# Altium PCB Lite Carrier for Mu.PcbDoc (part 7 of 15)
Units mm, origin at the board's own origin, x right, y up, seen from the top; angles counter-clockwise.
Board outline 146 x 102 mm, 20 copper layers (F.Cu, F.Mask, B.Cu, B.Mask, In1.Cu, F.SilkS, In2.Cu, B.SilkS, F.Adhes, B.Adhes, F.Paste, B.Paste, Dwgs.User, Cmts.User, Eco1.User, Eco2.User, Edge.Cuts, Margin, B.CrtYd, F.CrtYd); 254 components, 382 nets, 1258 pads, 1020 vias.
Unrouted connection lines stored in the file: 113.
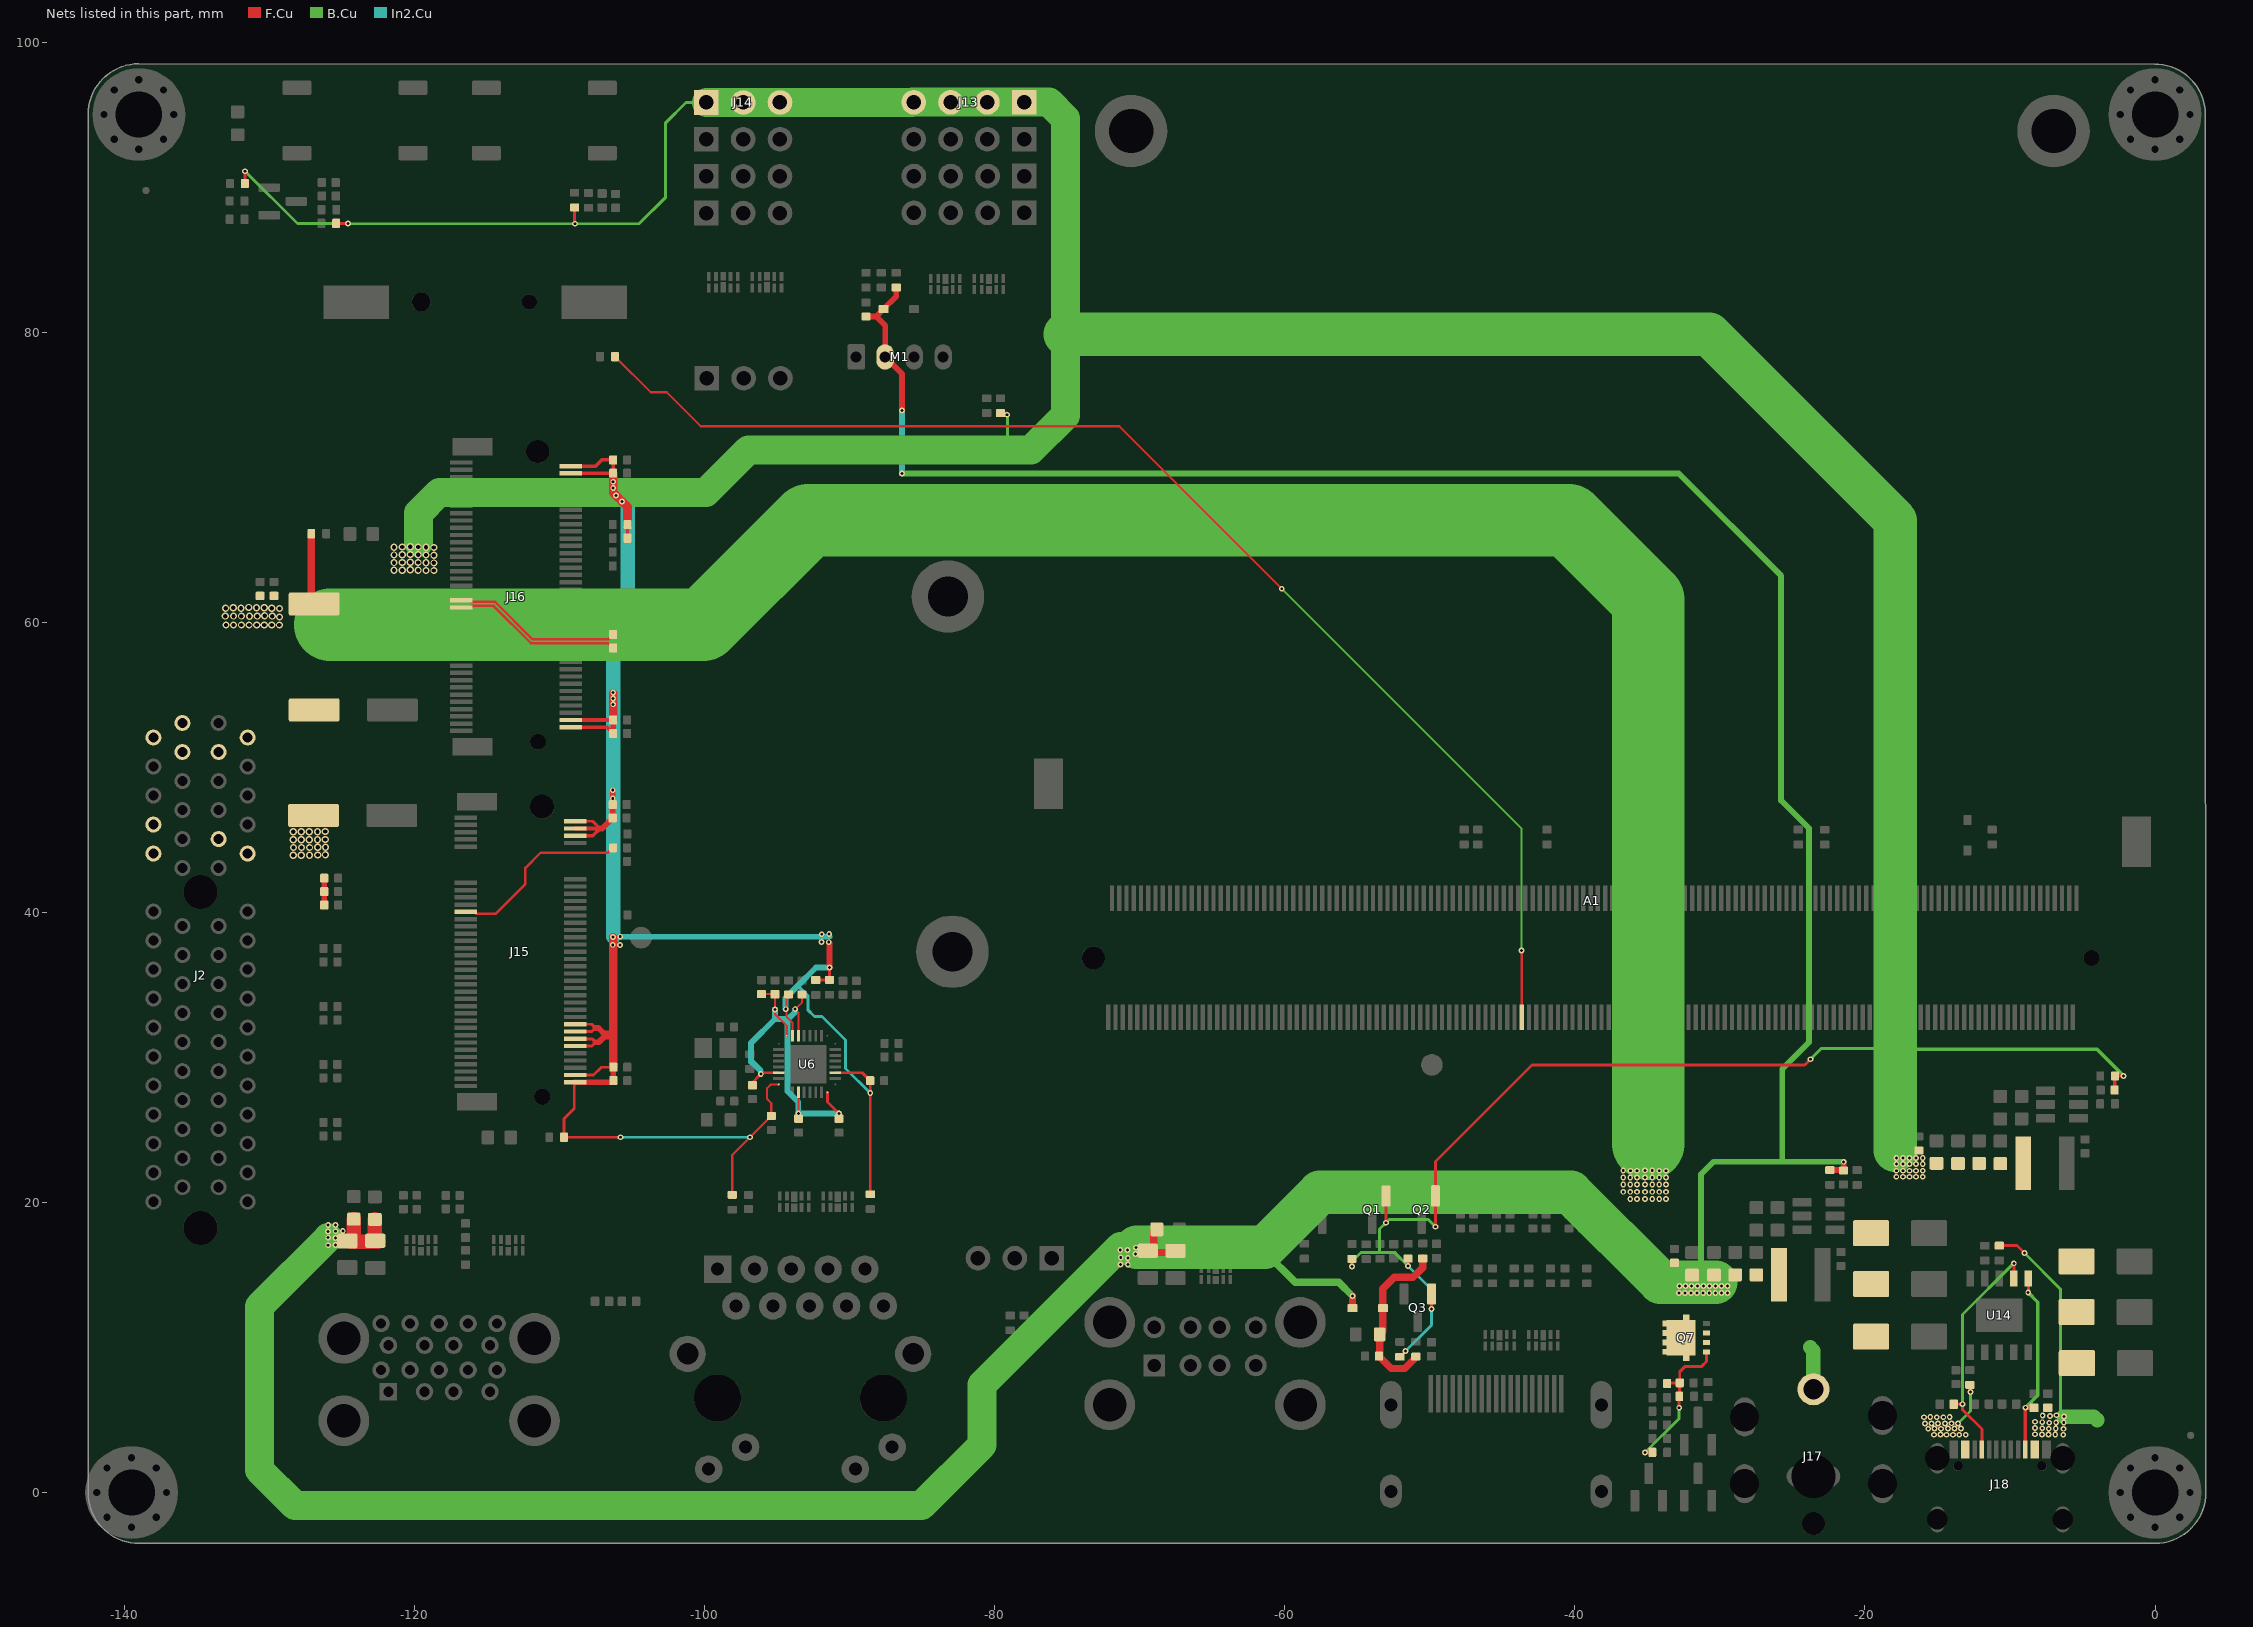
[diagram p18: the nets of this part, all layers, seen from the top]

## Components (designator, comment, footprint, x,y, rotation, side; value= is the part's Value field where it differs from the comment) (continued)
TP13 "Comment" TestPoint_Pad_D1.5mm#2 -13,48 r180 top value=TestPoint
U1 "Comment" Diodes_UDFN-10_1.0x2.5mm_P0.5mm#1 -42.18,10.497 r270 top value=TPAZ1023-04F
U2 "Comment" Diodes_UDFN-10_1.0x2.5mm_P0.5mm#1 -45.19,10.497 r270 top value=TPAZ1023-04F
U3 "Comment" Diodes_UDFN-10_1.0x2.5mm_P0.5mm#1 -119.55,17.057 r270 top value=ULC0524P
U4 "Comment" Diodes_UDFN-10_1.0x2.5mm_P0.5mm#2 -64.75,15.068 r270 top value=ULC0524P
U5 "Comment" Diodes_UDFN-10_1.0x2.5mm_P0.5mm#1 -113.53,17.057 r270 top value=ULC0524P
U6 "Comment" QFN-32-1EP_4x4mm_P0.4mm_EP2.65x2.65mm -92.935,29.54 r90 top value=RTL8111H-CG-RH
U7 "Comment" Diodes_UDFN-10_1.0x2.5mm_P0.5mm#3 -90.815,20.046 r270 top value=ULC0524P
U8 "Comment" Diodes_UDFN-10_1.0x2.5mm_P0.5mm#3 -93.815,20.041 r270 top value=ULC0524P
U9 "Comment" Diodes_UDFN-10_1.0x2.5mm_P0.5mm#1 -80.4,83.32 r270 top value=ULC0524P
U10 "Comment" Diodes_UDFN-10_1.0x2.5mm_P0.5mm#1 -98.71,83.443 r90 top value=ULC0524P
U11 "Comment" Diodes_UDFN-10_1.0x2.5mm_P0.5mm#1 -83.4,83.32 r270 top value=ULC0524P
U12 "Comment" Diodes_UDFN-10_1.0x2.5mm_P0.5mm#1 -95.7,83.44 r90 top value=ULC0524P
U13 "Comment" SOT-23 -34.91,0.372 r90 top value=TL431DBZ
U14 "Comment" ESSOP-10-1EP_3.9x5mm_P1.0mm_EP3.2x2.3 -10.74,12.22 r90 top value=CH224K
U15 "Comment" TSOT-23-6 -23.2,19.065 r180 top value=SY8253ADC
U16 "Comment" TSOT-23-6 -6.42,26.748 r180 top value=SY8253ADC
Y1 "Comment" Crystal_SMD_3225-4Pin_3.2x2.5mm -99.235,29.54 r270 top value=25MHz

## Footprints (in the part's own frame and the unit in brackets; to place one, negate y for a bottom-side part, rotate by r counter-clockwise, add the part's x,y. Pads: shape width x height; smd on the part's side, far side on the other; paste and mask are expansions set on the pad)
Battery_Holder_CR1220_S8411-45R [mm]
  rect 2.3x4.5 smd paste-4.5 mask-4.5: 1(0,-8.2) 2(0,8.2)
  round 1.05 hole 1.05 paste-2539.97 mask-1.05: Un1(0,3.725)
  round 1.3 hole 1.3 paste-2539.97 mask-1.3: Un2(0,-3.725)
  F.SilkS lines w0.254: 1.49,-8.307 6.832,-8.307 6.832,-6.625 3.296,-6.625 3.297,-6.625 ccw(c0,0) 3.295,6.626 ; -1.553,-8.307 -6.832,-8.307 -6.832,-6.625 -3.27,-6.625 -3.295,-6.626 cw(c0,0) -3.297,6.625
C_0402_1005Metric [mm]
  rrect25% 0.56x0.62 smd paste-0.62 mask-0.62: 1(-0.48,0) 2(0.48,0)
  F.SilkS lines w0.254: 0.108,0.36 -0.108,0.36 ; 0.108,-0.36 -0.108,-0.36
  F.CrtYd lines w0.254: 0.91,0.46 0.91,-0.46 -0.91,-0.46 -0.91,0.46 0.91,0.46
C_0603_1608Metric [mm]
  rrect25% 0.9x0.95 smd paste-0.95 mask-0.95: 1(-0.775,0) 2(0.775,0)
  F.SilkS lines w0.254: 0.141,0.51 -0.141,0.51 ; 0.141,-0.51 -0.141,-0.51
  F.CrtYd lines w0.254: 1.48,0.73 1.48,-0.73 -1.48,-0.73 -1.48,0.73 1.48,0.73
CP_Elec_6.3x7.7 [mm]
  rrect16% 3.5x1.6 smd paste-3.5 mask-3.5: 1(-2.7,0) 2(2.7,0)
  F.SilkS lines w0.254: -4.437,1.847 -3.65,1.847 ; -4.044,1.454 -4.044,2.241 ; -3.41,-1.06 -3.41,-2.346 -2.346,-3.41 3.41,-3.41 3.41,-1.06 ; -3.41,1.06 -3.41,2.346 -2.346,3.41 3.41,3.41 3.41,1.06
  F.CrtYd lines w0.254: -4.7,-1.05 -4.7,1.05 -3.55,1.05 -3.55,2.4 -2.4,3.55 3.55,3.55 3.55,1.05 4.7,1.05 4.7,-1.05 3.55,-1.05 3.55,-3.55 -2.4,-3.55 -3.55,-2.4 -3.55,-1.05 -4.7,-1.05
Crystal_SMD_3225-4Pin_3.2x2.5mm [mm]
  rect 1.4x1.2 smd paste-1.4 mask-1.4: 1(-1.1,-0.85) 2(1.1,-0.85) 3(1.1,0.85) 4(-1.1,0.85)
  F.SilkS lines w0.254: 0,-1.65 0,-0.01 -2,0 ; 2,-1.65 -2,-1.65 -2,1.65 2,1.65 2,-1.65
  F.CrtYd lines w0.254: 2.1,-1.7 -2.1,-1.7 -2.1,1.7 2.1,1.7 2.1,-1.7
D_0402_1005Metric [mm]
  rrect25% 0.59x0.64 smd paste-0.64 mask-0.64: 1(-0.485,0) 2(0.485,0)
  F.SilkS region: 0.1,-0.25 -0.09,0 0.1,0.25
  F.SilkS lines w0.254: -0.09,0.25 -0.09,-0.25
  F.CrtYd lines w0.254: -0.93,0.47 0.93,0.47 0.93,-0.47 -0.93,-0.47 -0.93,0.47
D_SMA [mm]
  rrect14% 2.5x1.8 smd paste-2.5 mask-2.5: 1(-2,0) 2(2,0)
  F.SilkS lines w0.254: 2,1.65 -3.51,1.65 -3.51,-1.65 2,-1.65 ; 0.501,-0.001 0.3,0 ; -0.401,0.4 -0.401,-0.4 ; -0.649,-0.001 -0.401,0 ; -0.401,0 0.3,-0.6 0.3,0.6 -0.401,0
  F.CrtYd lines w0.254: 3.5,1.75 3.5,-1.75 -3.5,-1.75 -3.5,1.75 3.5,1.75
D_SOD-323 [mm]
  rrect25% 0.7x0.55 smd paste-0.7 mask-0.7: 1(-1.05,0) 2(1.05,0)
  F.SilkS lines w0.254: 1.05,0.85 -1.61,0.85 -1.61,-0.85 1.05,-0.85 ; 0.425,0 0.175,0 ; -0.325,0.35 -0.325,-0.35 ; -0.525,0 -0.325,0 ; -0.325,0 0.175,-0.35 0.175,0.35 -0.325,0
  F.CrtYd lines w0.254: 1.6,0.95 -1.6,0.95 -1.6,-0.95 1.6,-0.95 1.6,0.95
DC_Jack_DC007B_30V_10A [mm]
  round 2.2 hole 1.4 paste-2539.97 mask-2.2: 1(0,-12)
  rrect100% 3.7x1.5 hole 3 slot 0.8 at 90 deg paste-2539.97 mask-3.7: 2(0,-6)
  rrect100% 1.5x2.7 hole 2 slot 0.8 at 0 deg paste-2539.97 mask-2.7: 3(-4.75,-5.5) 3(-4.75,-10.2) 3(4.75,-5.5) 3(4.75,-10.1)
  round 1.6 hole 1.6 paste-2539.97 mask-1.6: Un1(0,-2.75)
  F.SilkS lines w0.254: 5,0 5,-13 -5,-13 -5,0 5,0
Diodes_UDFN-10_1.0x2.5mm_P0.5mm#1 [mm]
  rect 0.625x0.25 smd paste-0.625 mask-0.625: 1(-0.387,1) 2(-0.387,0.5) 4(-0.387,-0.5) 5(-0.387,-1) 6(0.387,-1) 7(0.387,-0.5) 9(0.387,0.5) 10(0.387,1)
  rect 0.7x0.4 smd paste-0.7 mask-0.7: 3(-0.35,0)
  rect 0.575x0.4 smd paste-0.575 mask-0.575: 8(0.413,0)
  F.SilkS lines w0.254: 0.5,-1.35 -0.5,-1.35 ; 0.5,1.35 0,1.35
  F.CrtYd lines w0.254: 0.95,-1.5 -0.95,-1.5 -0.95,1.5 0.95,1.5 0.95,-1.5
Diodes_UDFN-10_1.0x2.5mm_P0.5mm#2 [mm]
  rect 0.625x0.25 smd paste-0.625 mask-0.625: 1(-0.387,1) 2(-0.387,0.5) 4(-0.387,-0.5) 5(-0.387,-1) 6(0.387,-1) 7(0.387,-0.5) 9(0.387,0.5) 10(0.387,1)
  rect 0.7x0.45 smd paste-0.7 mask-0.7: 3(-0.35,0)
  rect 0.575x0.45 smd paste-0.575 mask-0.575: 8(0.413,0)
  F.SilkS lines w0.254: 0.5,-1.35 -0.5,-1.35 ; 0.5,1.35 0,1.35
  F.CrtYd lines w0.254: 0.95,-1.5 -0.95,-1.5 -0.95,1.5 0.95,1.5 0.95,-1.5
Diodes_UDFN-10_1.0x2.5mm_P0.5mm#3 [mm]
  rect 0.625x0.25 smd paste-0.625 mask-0.625: 1(-0.387,1) 2(-0.387,0.5) 4(-0.387,-0.5) 5(-0.387,-1) 6(0.387,-1) 7(0.387,-0.5) 9(0.387,0.5) 10(0.387,1)
  rect 0.7x0.45 smd paste-0.7 mask-0.7: 3(-0.35,0)
  rect 0.575x0.45 smd paste-0.575 mask-0.575: 8(0.413,0)
  F.SilkS region: -0.89,1.31 -1.17,1.31 -0.89,1.59
  F.SilkS lines w0.254: 0.5,-1.36 -0.5,-1.36 ; 0.5,1.36 -0.5,1.36
  F.CrtYd lines w0.254: 0.95,-1.5 -0.95,-1.5 -0.95,1.5 0.95,1.5 0.95,-1.5
ESSOP-10-1EP_3.9x5mm_P1.0mm_EP3.2x2.3 [mm]
  rect 2.3x3.2 smd paste-3.2 mask-3.2: 0(0,0)
  rect 1.1x0.51 smd paste-1.1 mask-1.1: 1(-2.55,2) 2(-2.55,1) 3(-2.55,0) 4(-2.55,-1) 5(-2.55,-2) 6(2.55,-2) 7(2.55,-1) 8(2.55,0) 9(2.55,1) 10(2.55,2)
  F.SilkS circle w0.254: c-2.18,2.71 r0.22
  F.SilkS lines w0.254: -1.94,2.5 -1.94,-2.5 1.96,-2.5 1.96,2.5 -1.94,2.5
  F.CrtYd lines w0.254: -3.35,2.7 -3.35,-2.7 3.35,-2.7 3.35,2.7 -3.35,2.7
Fiducial_0.5mm_Mask1mm [mm]
  round 0.5 smd paste-0.5 mask-0.5: Un1(0,0)
  F.CrtYd circle w0.254: c0,0 r0.75
Fuse_0805_2012Metric [mm]
  rrect25% 0.975x1.4 smd paste-1.4 mask-1.4: 1(-0.937,0) 2(0.937,0)
  F.SilkS lines w0.254: 0.259,-0.71 -0.259,-0.71 ; 0.259,0.71 -0.259,0.71
  F.CrtYd lines w0.254: 1.68,-0.95 -1.68,-0.95 -1.68,0.95 1.68,0.95 1.68,-0.95
HDMI_A_Molex_208658-1001_Horizontal [mm]
  rect 2.6x0.3 smd paste-2.6 mask-2.6: 1(-3.285,4.5) 2(-3.285,4) 3(-3.285,3.5) 4(-3.285,3) 5(-3.285,2.5) 6(-3.285,2) 7(-3.285,1.5) 8(-3.285,1) 9(-3.285,0.5) 10(-3.285,0) 11(-3.285,-0.5) 12(-3.285,-1) 13(-3.285,-1.5) 14(-3.285,-2) 15(-3.285,-2.5) 16(-3.285,-3) 17(-3.285,-3.5) 18(-3.285,-4) 19(-3.285,-4.5)
  rrect100% 3.3x1.5 hole 0.9 slot 2.7 at 0 deg paste-2539.97 mask-3.3: SH(-2.525,7.25) SH(-2.525,-7.25)
  rrect100% 2.3x1.5 hole 0.9 slot 1.7 at 0 deg paste-2539.97 mask-2.3: SH(3.435,7.25) SH(3.435,-7.25)
  F.SilkS lines w0.254: 6.915,-7.61 4.815,-7.61 ; 2.115,-7.61 -0.685,-7.61 ; -4.235,-6.7 -4.235,-4.9 ; -4.985,4.9 -4.235,4.9 -4.235,6.7 ; 6.915,7.61 4.815,7.61 ; 2.115,7.61 -0.685,7.61
  Dwgs.User lines w0.254: 7.025,-7.5 7.025,7.5
  F.CrtYd lines w0.254: 4.52,-8.5 2.37,-8.5 2.37,-8.1 -0.96,-8.1 -0.96,-8.5 -4.69,-8.5 -4.69,-5.15 -5.09,-5.15 -5.09,5.15 -4.69,5.15 -4.69,8.5 -0.96,8.5 -0.96,8.1 2.37,8.1 2.37,8.5 4.52,8.5 4.52,8.1 8.53,8.1 8.53,-8.1 4.52,-8.1 4.52,-8.5
JST_PH_B4B-PH-K_1x04_P2.00mm_Vertical [mm]
  rrect21% 1.2x1.75 hole 0.75 paste-2539.97 mask-1.75: 1(0,0)
  rrect100% 1.2x1.75 hole 0.75 paste-2539.97 mask-1.75: 2(2,0) 3(4,0) 4(6,0)
  F.SilkS lines w0.254: -2.36,0.86 -2.36,2.11 -1.11,2.11 ; -2.06,-0.8 -1.45,-0.8 ; -2.06,0.5 -1.45,0.5 ; -0.3,1.81 -0.3,2.01 ; 0.5,1.81 0.5,1.2 -1.45,1.2 -1.45,-2.3 7.45,-2.3 7.45,1.2 5.5,1.2 5.5,1.81 ; 1,-1.8 0.9,-2.3 0.9,-1.8 1.1,-1.8 1.1,-2.3 ; 2.9,-2.3 2.9,-1.8 3.1,-1.8 3.1,-2.3 ; 3,-2.3 3,-1.8 ; 5.1,-2.3 5.1,-1.8 ; 7.45,-0.8 8.06,-0.8 ; 7.45,0.5 8.06,0.5 ; -0.3,2.01 -0.6,2.01 -0.6,1.81 -0.3,2.01 ; 5.1,-1.8 4.9,-1.8 4.9,-2.3 5.1,-1.8 ; -2.06,-2.91 -2.06,1.81 8.06,1.81 8.06,-2.91 -2.06,-2.91
  F.CrtYd lines w0.254: -2.45,-3.3 -2.45,2.2 8.45,2.2 8.45,-3.3 -2.45,-3.3
L_Sunlord_SWPA4020S [mm]
  rect 1.1x3.7 smd paste-3.7 mask-3.7: 1(-1.5,0) 2(1.5,0)
  F.SilkS lines w0.254: 2.26,2.11 2.26,2.26 -2.26,2.26 -2.26,2.11 ; 2.26,-2.11 2.26,-2.26 -2.26,-2.26 -2.26,-2.11
  F.CrtYd lines w0.254: 2.3,2.25 2.3,-2.25 -2.3,-2.25 -2.3,2.25 2.3,2.25
LattePanda_Module_H8.0mm_Horizontal [mm]
  rect 0.3x1.75 smd paste-1.75 mask-1.75: 1(33.375,4.1) 2(33.125,-4.1) 3(32.875,4.1) 4(32.625,-4.1) 5(32.375,4.1) 6(32.125,-4.1) 7(31.875,4.1) 8(31.625,-4.1) 9(31.375,4.1) 10(31.125,-4.1) 11(30.875,4.1) 12(30.625,-4.1) 13(30.375,4.1) 14(30.125,-4.1) 15(29.875,4.1) 16(29.625,-4.1) 17(29.375,4.1) 18(29.125,-4.1) 19(28.875,4.1) 20(28.625,-4.1) 21(28.375,4.1) 22(28.125,-4.1) 23(27.875,4.1) 24(27.625,-4.1) 25(27.375,4.1) 26(27.125,-4.1) 27(26.875,4.1) 28(26.625,-4.1) 29(26.375,4.1) 30(26.125,-4.1) 31(25.875,4.1) 32(25.625,-4.1) 33(25.375,4.1) 34(25.125,-4.1) 35(24.875,4.1) 36(24.625,-4.1) 37(24.375,4.1) 38(24.125,-4.1) 39(23.875,4.1) 40(23.625,-4.1) 41(23.375,4.1) 42(23.125,-4.1) 43(22.875,4.1) 44(22.625,-4.1) 45(22.375,4.1) 46(22.125,-4.1) 47(21.875,4.1) 48(21.625,-4.1) 49(21.375,4.1) 50(21.125,-4.1) 51(20.875,4.1) 52(20.625,-4.1) 53(20.375,4.1) 54(20.125,-4.1) 55(19.875,4.1) 56(19.625,-4.1) 57(19.375,4.1) 58(19.125,-4.1) 59(18.875,4.1) 60(18.625,-4.1) 61(18.375,4.1) 62(18.125,-4.1) 63(17.875,4.1) 64(17.625,-4.1) 65(17.375,4.1) 66(17.125,-4.1) 67(16.875,4.1) 68(16.625,-4.1) 69(16.375,4.1) 70(16.125,-4.1) 71(15.875,4.1) 72(15.625,-4.1) 73(15.375,4.1) 74(15.125,-4.1) 75(14.875,4.1) 76(14.625,-4.1) 77(14.375,4.1) 78(14.125,-4.1) 79(13.875,4.1) 80(13.625,-4.1) 81(13.375,4.1) 82(13.125,-4.1) 83(12.875,4.1) 84(12.625,-4.1) 85(12.375,4.1) 86(12.125,-4.1) 87(11.875,4.1) 88(11.625,-4.1) 89(11.375,4.1) 90(11.125,-4.1) 91(10.875,4.1) 92(10.625,-4.1) 93(10.375,4.1) 94(10.125,-4.1) 95(9.875,4.1) 96(9.625,-4.1) 97(9.375,4.1) 98(9.125,-4.1) 99(8.875,4.1) 100(8.625,-4.1) 101(8.375,4.1) 102(8.125,-4.1) 103(7.875,4.1) 104(7.625,-4.1) 105(7.375,4.1) 106(7.125,-4.1) 107(6.875,4.1) 108(6.625,-4.1) 109(6.375,4.1) 110(6.125,-4.1) 111(5.875,4.1) 112(5.625,-4.1) 113(5.375,4.1) 114(5.125,-4.1) 115(4.875,4.1) 116(4.625,-4.1) 117(4.375,4.1) 118(4.125,-4.1) 119(3.875,4.1) 120(3.625,-4.1) 121(3.375,4.1) 122(3.125,-4.1) 123(2.875,4.1) 124(2.625,-4.1) 125(2.375,4.1) 126(2.125,-4.1) 127(1.875,4.1) 128(1.625,-4.1) 129(1.375,4.1) 130(1.125,-4.1) 131(0.875,4.1) 132(0.625,-4.1) 133(0.375,4.1) 134(0.125,-4.1) 135(-0.125,4.1) 136(-0.375,-4.1) 137(-0.625,4.1) 138(-0.875,-4.1) 139(-1.125,4.1) 140(-1.375,-4.1) 141(-1.625,4.1) 142(-1.875,-4.1) 143(-2.125,4.1) 144(-2.375,-4.1) 145(-4.625,4.1) 146(-4.875,-4.1) 147(-5.125,4.1) 148(-5.375,-4.1) 149(-5.625,4.1) 150(-5.875,-4.1) 151(-6.125,4.1) 152(-6.375,-4.1) 153(-6.625,4.1) 154(-6.875,-4.1) 155(-7.125,4.1) 156(-7.375,-4.1) 157(-7.625,4.1) 158(-7.875,-4.1) 159(-8.125,4.1) 160(-8.375,-4.1) 161(-8.625,4.1) 162(-8.875,-4.1) 163(-9.125,4.1) 164(-9.375,-4.1) 165(-9.625,4.1) 166(-9.875,-4.1) 167(-10.125,4.1) 168(-10.375,-4.1) 169(-10.625,4.1) 170(-10.875,-4.1) 171(-11.125,4.1) 172(-11.375,-4.1) 173(-11.625,4.1) 174(-11.875,-4.1) 175(-12.125,4.1) 176(-12.375,-4.1) 177(-12.625,4.1) 178(-12.875,-4.1) 179(-13.125,4.1) 180(-13.375,-4.1) 181(-13.625,4.1) 182(-13.875,-4.1) 183(-14.125,4.1) 184(-14.375,-4.1) 185(-14.625,4.1) 186(-14.875,-4.1) 187(-15.125,4.1) 188(-15.375,-4.1) 189(-15.625,4.1) 190(-15.875,-4.1) 191(-16.125,4.1) 192(-16.375,-4.1) 193(-16.625,4.1) 194(-16.875,-4.1) 195(-17.125,4.1) 196(-17.375,-4.1) 197(-17.625,4.1) 198(-17.875,-4.1) 199(-18.125,4.1) 200(-18.375,-4.1) 201(-18.625,4.1) 202(-18.875,-4.1) 203(-19.125,4.1) 204(-19.375,-4.1) 205(-19.625,4.1) 206(-19.875,-4.1) 207(-20.125,4.1) 208(-20.375,-4.1) 209(-20.625,4.1) 210(-20.875,-4.1) 211(-21.125,4.1) 212(-21.375,-4.1) 213(-21.625,4.1) 214(-21.875,-4.1) 215(-22.125,4.1) 216(-22.375,-4.1) 217(-22.625,4.1) 218(-22.875,-4.1) 219(-23.125,4.1) 220(-23.375,-4.1) 221(-23.625,4.1) 222(-23.875,-4.1) 223(-24.125,4.1) 224(-24.375,-4.1) 225(-24.625,4.1) 226(-24.875,-4.1) 227(-25.125,4.1) 228(-25.375,-4.1) 229(-25.625,4.1) 230(-25.875,-4.1) 231(-26.125,4.1) 232(-26.375,-4.1) 233(-26.625,4.1) 234(-26.875,-4.1) 235(-27.125,4.1) 236(-27.375,-4.1) 237(-27.625,4.1) 238(-27.875,-4.1) 239(-28.125,4.1) 240(-28.375,-4.1) 241(-28.625,4.1) 242(-28.875,-4.1) 243(-29.125,4.1) 244(-29.375,-4.1) 245(-29.625,4.1) 246(-29.875,-4.1) 247(-30.125,4.1) 248(-30.375,-4.1) 249(-30.625,4.1) 250(-30.875,-4.1) 251(-31.125,4.1) 252(-31.375,-4.1) 253(-31.625,4.1) 254(-31.875,-4.1) 255(-32.125,4.1) 256(-32.375,-4.1) 257(-32.625,4.1) 258(-32.875,-4.1) 259(-33.125,4.1) 260(-33.375,-4.1)
  rect 2x3.5 smd paste-3.5 mask-3.5: MP(-37.5,-8) MP(37.5,-12)
  round 1.1 hole 1.1 paste-2539.97 mask-1.1: Un1(-34.4,0)
  round 1.6 hole 1.6 paste-2539.97 mask-1.6: Un2(34.4,0)
  F.SilkS lines w0.254: 38.6,5.1 38.6,-20.95 34.9,-20.95 34.9,-57 cw(c31.8,-57) 31.8,-60.1 -31.8,-60.1 cw(c-31.8,-57) -34.9,-57 -34.9,-20.95 -38.6,-20.95 -38.6,5.1 38.6,5.1
  Cmts.User lines w0.254: -13,-50.5 -25,-50.5 -30,-55.5 ; -29,-55 -30,-55.5 ; -29.5,-54.5 -30,-55.5
  F.CrtYd lines w0.254: 38.7,5.2 38.7,-21.05 35,-21.05 35,-57 cw(c31.8,-57) 31.8,-60.2 -31.8,-60.2 cw(c-31.8,-57) -35,-57 -35,-21.05 -38.7,-21.05 -38.7,5.2 38.7,5.2
LED_0603_1608Metric [mm]
  rrect25% 0.875x0.95 smd paste-0.95 mask-0.95: 1(-0.787,0) 2(0.787,0)
  F.SilkS region: 0.2,-0.3 -0.2,0 0.2,0.3
  F.SilkS lines w0.254: 0.8,-0.735 -1.485,-0.735 -1.485,0.735 0.8,0.735
  F.CrtYd lines w0.254: -1.48,-0.73 -1.48,0.73 1.48,0.73 1.48,-0.73 -1.48,-0.73
MOSFET_PDFN8_3.3x3.3 [mm]
  rect 0.35x0.5 smd paste-0.5 mask-0.5: 1(-0.975,-1.4) 2(-0.325,-1.4) 3(0.325,-1.4) 4(0.975,-1.4)
  rect 0.4x0.3 smd paste-0.4 mask-0.4: 5(0.975,1.5) 6(0.325,1.5) 7(-0.325,1.5) 8(-0.975,1.5)
  rect 2.45x1.98 smd paste-2.45 mask-2.45: 9(0,0.36)
  rect 0.38x0.43 smd paste-0.43 mask-0.43: 10(1.415,0) 11(-1.415,0)
  F.SilkS lines w0.254: -0.975,-2.1 ccw(c-0.975,-2.15) -0.975,-2.2 ccw(c-0.975,-2.15) -0.975,-2.1
  F.CrtYd lines w0.254: -2.605,2.65 2.605,2.65 2.605,-2.65 -2.605,-2.65 -2.605,2.65
MountingHole_2.7mm_M2_Pad_TopOnly [mm]
  round 2.9 hole 2.75 paste-2539.97 mask-2.9: 1(0,0)
  round 5 smd paste-5 mask-5: 1(0,0)
  Cmts.User circle w0.254: c0,0 r2.9
  F.CrtYd circle w0.254: c0,0 r3.05
MountingHole_3.2mm_M3_Pad_Via [mm]
  round 0.8 hole 0.5 paste-2539.97 mask-0.8: 1(-2.4,0) 1(-1.697,-1.697) 1(-1.697,1.697) 1(0,-2.4) 1(0,2.4) 1(1.697,-1.697) 1(1.697,1.697) 1(2.4,0)
  round 6.4 hole 3.2 paste-2539.97 mask-6.4: 1(0,0)
  Cmts.User circle w0.254: c0,0 r3.2
  F.CrtYd circle w0.254: c0,0 r3.45
MountingHole_3mm_M2_Pad_TopOnly [mm]
  round 3.2 hole 3.05 paste-2539.97 mask-3.2: 1(0,0)
  round 5 smd paste-5 mask-5: 1(0,0)
  Cmts.User circle w0.254: c0,0 r2.8
  F.CrtYd circle w0.254: c0,0 r3.05
PCIe_M.2_Connectors_P=0.5mm_H=4.2mm_KeyE [mm]
  rect 0.3x1.55 smd paste-1.55 mask-1.55: 1(0,0) 2(0.25,-7.55) 3(0.5,0) 4(0.75,-7.55) 5(1,0) 6(1.25,-7.55) 7(1.5,0) 8(1.75,-7.55) 9(2,0) 10(2.25,-7.55) 11(2.5,0) 12(2.75,-7.55) 13(3,0) 14(3.25,-7.55) 15(3.5,0) 16(3.75,-7.55) 17(4,0) 18(4.25,-7.55) 19(4.5,0) 20(4.75,-7.55) 21(5,0) 22(5.25,-7.55) 23(5.5,0) 32(7.75,-7.55) 33(8,0) 34(8.25,-7.55) 35(8.5,0) 36(8.75,-7.55) 37(9,0) 38(9.25,-7.55) 39(9.5,0) 40(9.75,-7.55) 41(10,0) 42(10.25,-7.55) 43(10.5,0) 44(10.75,-7.55) 45(11,0) 46(11.25,-7.55) 47(11.5,0) 48(11.75,-7.55) 49(12,0) 50(12.25,-7.55) 51(12.5,0) 52(12.75,-7.55) 53(13,0) 54(13.25,-7.55) 55(13.5,0) 56(13.75,-7.55) 57(14,0) 58(14.25,-7.55) 59(14.5,0) 60(14.75,-7.55) 61(15,0) 62(15.25,-7.55) 63(15.5,0) 64(15.75,-7.55) 65(16,0) 66(16.25,-7.55) 67(16.5,0) 68(16.75,-7.55) 69(17,0) 70(17.25,-7.55) 71(17.5,0) 72(17.75,-7.55) 73(18,0) 74(18.25,-7.55) 75(18.5,0)
  rect 1.2x2.75 smd paste-2.75 mask-2.75: MP1(-1.1,-0.775) MP2(19.6,-0.775)
  round 1.1 hole 1.1 paste-2539.97 mask-1.1: Un1(-0.75,-5.275)
  round 1.6 hole 1.6 paste-2539.97 mask-1.6: Un2(19.25,-5.275)
  F.SilkS lines w0.254: -0.05,1.425 ccw(c0,1.425) 0.05,1.425 ; -0.05,1.425 ccw(c0,1.425) 0.05,1.425 ; -0.05,1.425 cw(c0,1.425) 0.05,1.425 ; -1.75,-8.575 -1.75,-2.825 -1.75,-8.575 ; -1.75,-8.575 -0.5,-8.575 -1.75,-8.575 ; 20.25,-8.575 20.25,-2.825 20.25,-8.575 ; 20.25,-8.575 19,-8.575 20.25,-8.575
  F.CrtYd lines w0.254: -2.75,1.775 21.25,1.775 21.25,-9.575 -2.75,-9.575 -2.75,1.775
PCIe_M.2_Connectors_P=0.5mm_H=4.2mm_KeyM [mm]
  rect 0.3x1.55 smd paste-1.55 mask-1.55: 1(-9.25,3.575) 2(-9,-3.975) 3(-8.75,3.575) 4(-8.5,-3.975) 5(-8.25,3.575) 6(-8,-3.975) 7(-7.75,3.575) 8(-7.5,-3.975) 9(-7.25,3.575) 10(-7,-3.975) 11(-6.75,3.575) 12(-6.5,-3.975) 13(-6.25,3.575) 14(-6,-3.975) 15(-5.75,3.575) 16(-5.5,-3.975) 17(-5.25,3.575) 18(-5,-3.975) 19(-4.75,3.575) 20(-4.5,-3.975) 21(-4.25,3.575) 22(-4,-3.975) 23(-3.75,3.575) 24(-3.5,-3.975) 25(-3.25,3.575) 26(-3,-3.975) 27(-2.75,3.575) 28(-2.5,-3.975) 29(-2.25,3.575) 30(-2,-3.975) 31(-1.75,3.575) 32(-1.5,-3.975) 33(-1.25,3.575) 34(-1,-3.975) 35(-0.75,3.575) 36(-0.5,-3.975) 37(-0.25,3.575) 38(0,-3.975) 39(0.25,3.575) 40(0.5,-3.975) 41(0.75,3.575) 42(1,-3.975) 43(1.25,3.575) 44(1.5,-3.975) 45(1.75,3.575) 46(2,-3.975) 47(2.25,3.575) 48(2.5,-3.975) 49(2.75,3.575) 50(3,-3.975) 51(3.25,3.575) 52(3.5,-3.975) 53(3.75,3.575) 54(4,-3.975) 55(4.25,3.575) 56(4.5,-3.975) 57(4.75,3.575) 58(5,-3.975) 67(7.25,3.575) 68(7.5,-3.975) 69(7.75,3.575) 70(8,-3.975) 71(8.25,3.575) 72(8.5,-3.975) 73(8.75,3.575) 74(9,-3.975) 75(9.25,3.575)
  rect 1.2x2.75 smd paste-2.75 mask-2.75: MP1(-10.35,2.8) MP2(10.35,2.8)
  round 1.15 hole 1.15 paste-2539.97 mask-1.15: Un1(-10,-1.7)
  round 1.65 hole 1.65 paste-2539.97 mask-1.65: Un2(10,-1.7)
  F.SilkS lines w0.254: -11,1 -11,-3.975 -10,-3.975 ; 11,1 11,-3.975 10,-4 ; -9.3,4.6 cw(c-9.25,4.6) -9.2,4.6 cw(c-9.25,4.6) -9.3,4.6
  F.CrtYd lines w0.254: -12,5.65 12,5.65 12,-5.75 -12,-5.75 -12,5.65
PCIe_x4_Gen3Slot_Connectors [mm]
  round 1.1 hole 0.7 paste-2539.97 mask-1.1: A1(0,0) A2(1,2) A3(2,0) A4(3,2) A5(4,0) A6(5,2) A7(6,0) A8(7,2) A9(8,0) A10(9,2) A11(10,0) A12(13,2) A13(14,0) A14(15,2) A15(16,0) A16(17,2) A17(18,0) A18(19,2) A19(20,0) A20(21,2) A21(22,0) A22(23,2) A23(24,0) A24(25,2) A25(26,0) A26(27,2) A27(28,0) A28(29,2) A29(30,0) A30(31,2) A31(32,0) A32(33,2) B1(0,-2.5) B2(1,-4.5) B3(2,-2.5) B4(3,-4.5) B5(4,-2.5) B6(5,-4.5) B7(6,-2.5) B8(7,-4.5) B9(8,-2.5) B10(9,-4.5) B11(10,-2.5) B12(13,-4.5) B13(14,-2.5) B14(15,-4.5) B15(16,-2.5) B16(17,-4.5) B17(18,-2.5) B18(19,-4.5) B19(20,-2.5) B20(21,-4.5) B21(22,-2.5) B22(23,-4.5) B23(24,-2.5) B24(25,-4.5) B25(26,-2.5) B26(27,-4.5) B27(28,-2.5) B28(29,-4.5) B29(30,-2.5) B30(31,-4.5) B31(32,-2.5) B32(33,-4.5)
  round 2.35 hole 2.35 paste-2539.97 mask-2.35: Un1(11.65,-1.25) Un2(34.8,-1.25)
  F.SilkS lines w0.254: 36.9,2.25 36.9,-6.35 -2.1,-6.35 -2.1,2.45
  F.CrtYd lines w0.254: 37.9,-7.35 -3.1,-7.35 -3.1,3.6 37.9,3.6 37.9,-7.35
PinHeader_1x03_P2.54mm_Vertical [mm]
  rect 1.7x1.7 hole 1 paste-2539.97 mask-1.7: 1(0,0)
  rrect100% 1.7x1.7 hole 1 paste-2539.97 mask-1.7: 2(0,-2.54) 3(0,-5.08)
  F.SilkS lines w0.254: 0,1.33 -1.33,1.33 -1.33,0 ; -1.33,-1.27 -1.33,-6.41 1.33,-6.41 1.33,-1.27 -1.33,-1.27
  F.CrtYd lines w0.254: -1.8,1.8 1.8,1.8 1.8,-6.85 -1.8,-6.85 -1.8,1.8
PinHeader_1x04_P2.54mm_Vertical [mm]
  rect 1.7x1.7 hole 1 paste-2539.97 mask-1.7: 1(0,0)
  rrect100% 1.7x1.7 hole 1 paste-2539.97 mask-1.7: 2(0,-2.54) 3(0,-5.08) 4(0,-7.62)
  F.SilkS lines w0.254: -1.33,0 -1.33,1.33 0,1.33 ; 1.33,-8.95 -1.33,-8.95 -1.33,-1.27 1.33,-1.27 1.33,-8.95
  F.CrtYd lines w0.254: 1.8,-9.4 -1.8,-9.4 -1.8,1.8 1.8,1.8 1.8,-9.4
QFN-32-1EP_4x4mm_P0.4mm_EP2.65x2.65mm [mm]
  round 0.129 smd paste-0.129 mask-0.129: 1(-1.95,1.4) 8(-1.95,-1.4) 9(-1.4,-1.95) 16(1.4,-1.95) 17(1.95,-1.4) 24(1.95,1.4) 25(1.4,1.95) 32(-1.4,1.95)
  rrect25% 0.8x0.2 smd paste-0.8 mask-0.8: 2(-1.95,1) 3(-1.95,0.6) 4(-1.95,0.2) 5(-1.95,-0.2) 6(-1.95,-0.6) 7(-1.95,-1) 18(1.95,-1) 19(1.95,-0.6) 20(1.95,-0.2) 21(1.95,0.2) 22(1.95,0.6) 23(1.95,1)
  rrect25% 0.2x0.8 smd paste-0.8 mask-0.8: 10(-1,-1.95) 11(-0.6,-1.95) 12(-0.2,-1.95) 13(0.2,-1.95) 14(0.6,-1.95) 15(1,-1.95) 26(1,1.95) 27(0.6,1.95) 28(0.2,1.95) 29(-0.2,1.95) 30(-0.6,1.95) 31(-1,1.95)
  rect 2.65x2.65 smd paste-2.65 mask-2.65: 33(0,0)
  rrect23% 1.07x1.07 on Mid13 paste-1.07 mask-1.07: Un1(-0.66,0.66) Un2(-0.66,-0.66) Un3(0.66,0.66) Un4(0.66,-0.66)
  F.Cu region: -1.6,1.379 -1.6,1.35 -2.3,1.35 -2.3,1.45 -1.671,1.45
  F.Cu region: -1.6,-1.379 -1.671,-1.45 -2.3,-1.45 -2.3,-1.35 -1.6,-1.35
  F.Cu region: -1.35,-2.3 -1.45,-2.3 -1.45,-1.671 -1.379,-1.6 -1.35,-1.6
  F.Cu region: 1.45,-1.671 1.45,-2.3 1.35,-2.3 1.35,-1.6 1.379,-1.6
  F.Cu region: 2.3,-1.45 1.671,-1.45 1.6,-1.379 1.6,-1.35 2.3,-1.35
  F.Cu region: 2.3,1.35 1.6,1.35 1.6,1.379 1.671,1.45 2.3,1.45
  F.Cu region: 1.45,1.671 1.379,1.6 1.35,1.6 1.35,2.3 1.45,2.3
  F.Cu region: -1.35,1.6 -1.379,1.6 -1.45,1.671 -1.45,2.3 -1.35,2.3
  F.Mask region: -1.6,1.379 -1.6,1.35 -2.3,1.35 -2.3,1.45 -1.671,1.45
  F.Mask region: -1.6,-1.379 -1.671,-1.45 -2.3,-1.45 -2.3,-1.35 -1.6,-1.35
  F.Mask region: -1.35,-2.3 -1.45,-2.3 -1.45,-1.671 -1.379,-1.6 -1.35,-1.6
  F.Mask region: 1.45,-1.671 1.45,-2.3 1.35,-2.3 1.35,-1.6 1.379,-1.6
  F.Mask region: 2.3,-1.45 1.671,-1.45 1.6,-1.379 1.6,-1.35 2.3,-1.35
  F.Mask region: 2.3,1.35 1.6,1.35 1.6,1.379 1.671,1.45 2.3,1.45
  F.Mask region: 1.45,1.671 1.379,1.6 1.35,1.6 1.35,2.3 1.45,2.3
  F.Mask region: -1.35,1.6 -1.379,1.6 -1.45,1.671 -1.45,2.3 -1.35,2.3
  F.SilkS circle w0.254: c-1.935,2.11 r0.252
  F.SilkS lines w0.254: -2.11,2.11 -1.76,2.11 ; 1.76,2.11 2.11,2.11 2.11,1.76 ; -2.11,-1.76 -2.11,-2.11 -1.76,-2.11 ; 2.11,-1.76 2.11,-2.11 1.76,-2.11
  F.Paste region: -1.6,1.379 -1.6,1.35 -2.3,1.35 -2.3,1.45 -1.671,1.45
  F.Paste region: -1.6,-1.379 -1.671,-1.45 -2.3,-1.45 -2.3,-1.35 -1.6,-1.35
  F.Paste region: -1.35,-2.3 -1.45,-2.3 -1.45,-1.671 -1.379,-1.6 -1.35,-1.6
  F.Paste region: 1.45,-1.671 1.45,-2.3 1.35,-2.3 1.35,-1.6 1.379,-1.6
  F.Paste region: 2.3,-1.45 1.671,-1.45 1.6,-1.379 1.6,-1.35 2.3,-1.35
  F.Paste region: 2.3,1.35 1.6,1.35 1.6,1.379 1.671,1.45 2.3,1.45
  F.Paste region: 1.45,1.671 1.379,1.6 1.35,1.6 1.35,2.3 1.45,2.3
  F.Paste region: -1.35,1.6 -1.379,1.6 -1.45,1.671 -1.45,2.3 -1.35,2.3
  F.CrtYd lines w0.254: -2.6,2.6 2.6,2.6 2.6,-2.6 -2.6,-2.6 -2.6,2.6
R_0402_1005Metric#1 [mm]
  rrect25% 0.54x0.64 smd paste-0.64 mask-0.64: 1(-0.51,0) 2(0.51,0)
  F.SilkS lines w0.254: 0.1,0.27 0.1,-0.27 -0.1,-0.27 -0.1,0.27 0.1,0.27
  F.CrtYd lines w0.254: 0.93,0.47 0.93,-0.47 -0.93,-0.47 -0.93,0.47 0.93,0.47
R_0402_1005Metric#2 [mm]
  rrect25% 0.54x0.64 smd paste-0.64 mask-0.64: 1(-0.51,0) 2(0.51,0)
  F.SilkS lines w0.254: -0.154,-0.38 0.154,-0.38 ; -0.154,0.38 0.154,0.38
  F.CrtYd lines w0.254: -0.93,-0.47 -0.93,0.47 0.93,0.47 0.93,-0.47 -0.93,-0.47
R_0603_1608Metric [mm]
  rrect25% 0.8x0.95 smd paste-0.95 mask-0.95: 1(-0.825,0) 2(0.825,0)
  F.SilkS lines w0.254: 0.237,0.523 -0.237,0.523 ; 0.237,-0.523 -0.237,-0.523
  F.CrtYd lines w0.254: 1.48,0.73 1.48,-0.73 -1.48,-0.73 -1.48,0.73 1.48,0.73
R_0805_2012Metric [mm]
  rrect24% 1.025x1.4 smd paste-1.4 mask-1.4: 1(-0.913,0) 2(0.913,0)
  F.SilkS lines w0.254: 0.227,-0.735 -0.227,-0.735 ; 0.227,0.735 -0.227,0.735
  F.CrtYd lines w0.254: 1.68,-0.95 -1.68,-0.95 -1.68,0.95 1.68,0.95 1.68,-0.95
RJ45_UDE_RB1-125B8G1A [mm]
  round 1.9 hole 0.9 paste-2539.97 mask-1.9: L1(12.04,-12.27) L2(9.5,-13.79) L3(1.93,-12.27) L4(-0.61,-13.79) R2(1.27,-2.54) R3(2.54,0) R4(3.81,-2.54) R5(5.08,0) R6(6.35,-2.54) R7(7.62,0) R8(8.89,-2.54) R9(10.16,0) R10(11.43,-2.54)
  rect 1.9x1.9 hole 0.9 paste-2539.97 mask-1.9: R1(0,0)
  round 2.5 hole 1.5 paste-2539.97 mask-2.5: SH(-2.06,-5.84) SH(13.49,-5.84)
  round 3.25 hole 3.25 paste-2539.97 mask-3.25: Un1(0,-8.89) Un2(11.43,-8.89)
  F.SilkS lines w0.254: -2.36,-7.58 -2.36,-19.98 13.79,-19.98 13.79,-7.58 ; -2.36,-4.08 -2.36,2.2 13.79,2.2 13.79,-4.08
  Dwgs.User lines w0.254: -2.16,-18.78 0.84,-15.78 ; -2.16,-17.78 -0.16,-15.78 ; -2.16,-16.78 -1.16,-15.78 ; -1.16,-19.78 2.84,-15.78 ; -0.6,-8.09 0.6,-6.89 ; -0.6,-7.09 0.6,-5.89 ; -0.6,-6.09 0.6,-4.89 ; -0.6,-5.09 0.6,-3.89 ; -0.6,-4.09 -0.2,-3.69 ; -0.16,-19.78 3.84,-15.78 ; 0.6,-7.89 -0.6,-9.09 ; 0.84,-19.77 6.33,-14.28 ; 1.84,-19.78 7.22,-14.4 ; 1.84,-15.78 -2.16,-19.78 ; 2.84,-19.77 7.22,-15.39 ; 3.84,-19.78 7.84,-15.78 ; 4.21,-15.41 5.34,-14.29 ; 4.84,-19.78 8.84,-15.78 ; 5.84,-19.78 9.84,-15.78 ; 6.84,-19.78 10.84,-15.78 ; 7.84,-19.78 11.84,-15.78 ; 8.84,-19.78 12.84,-15.78 ; 9.84,-19.78 13.59,-16.03 ; 10.83,-8.09 12.03,-6.89 ; 10.83,-7.09 12.03,-5.89 ; 10.83,-6.09 12.03,-4.89 ; 10.83,-5.09 12.03,-3.89 ; 10.83,-4.09 11.23,-3.69 ; 10.84,-19.77 13.59,-17.02 ; 11.84,-19.77 13.59,-18.02 ; 12.03,-7.89 10.83,-9.09 ; 12.84,-19.77 13.59,-19.02 ; -2.16,-19.78 -2.16,-15.78 4.21,-15.78 4.21,-14.28 7.22,-14.28 7.22,-15.78 13.59,-15.78 13.59,-19.78 -2.16,-19.78 ; -0.6,-9.09 0.6,-9.09 0.6,-3.69 -0.6,-3.69 -0.6,-9.09 ; 10.83,-9.09 12.03,-9.09 12.03,-3.69 10.83,-3.69 10.83,-9.09
  F.CrtYd lines w0.254: -3.81,-7.59 -2.66,-7.59 -2.66,-20.28 14.09,-20.28 14.09,-7.59 15.24,-7.59 15.24,-4.09 14.09,-4.09 14.09,2.5 -2.66,2.5 -2.66,-4.09 -3.81,-4.09 -3.81,-7.59
SOT-23 [mm]
  rrect25% 1.475x0.6 smd paste-1.475 mask-1.475: 1(-0.937,0.95) 2(-0.937,-0.95) 3(0.937,0)
  F.SilkS lines w0.254: 0.65,-1.56 0,-1.56 -0.65,-1.56 ; 0.65,1.56 0,1.56 -1.675,1.56
  F.CrtYd lines w0.254: 1.92,-1.7 -1.92,-1.7 -1.92,1.7 1.92,1.7 1.92,-1.7
SW_Push_6x6x6 [mm]
  rrect25% 2x1 smd paste-2 mask-2: 1(-4,2.25) 1(4,2.25) 2(-4,-2.25) 2(4,-2.25)
  F.SilkS circle w0.254: c2,-2 r0.5
  F.SilkS circle w0.254: c2,2 r0.5
  F.SilkS circle w0.254: c0,0 r1.75
  F.SilkS circle w0.254: c-2,-2 r0.5
  F.SilkS circle w0.254: c-2,2 r0.5
  F.SilkS lines w0.254: 3,3 3,-3 -3,-3 -3,3 3,3
TestPoint_Pad_D1.5mm#1 [mm]
  round 1.5 smd paste-1.5 mask-1.5: 1(0,0)
  F.SilkS circle w0.254: c0,0 r0.95
  F.CrtYd circle w0.254: c0,0 r1.25
TestPoint_Pad_D1.5mm#2 [mm]
  round 1.5 on Mid2 paste-1.5 mask-1.5: 1(0,0)
  B.SilkS circle w0.254: c0,0 r0.95
  B.CrtYd circle w0.254: c0,0 r1.25
TSOT-23-6 [mm]
  rrect25% 1.325x0.6 smd paste-1.325 mask-1.325: 1(-1.138,0.95) 2(-1.138,0) 3(-1.138,-0.95) 4(1.138,-0.95) 5(1.138,0) 6(1.138,0.95)
  F.SilkS circle w0.254: c-1.12,1.56 r0.2
  F.SilkS lines w0.254: 0.8,1.56 0,1.56 -0.5,1.56 ; 0.8,-1.56 0,-1.56 -0.8,-1.56
  F.CrtYd lines w0.254: 2.05,1.7 2.05,-1.7 -2.05,-1.7 -2.05,1.7 2.05,1.7
USB3_A_Molex_48406-0001_Horizontal_Stacked [mm]
  rect 1.2x1.2 hole 0.7 paste-2539.97 mask-1.2: 1(0,0)
  round 1.2 hole 0.7 paste-2539.97 mask-1.2: 2(2.5,0) 3(4.5,0) 4(7,0) 5(7.5,1.5) 6(5.5,1.5) 7(3.5,1.5) 8(1.5,1.5) 9(-0.5,1.5) 10(0,3.2) 11(2.5,3.2) 12(4.5,3.2) 13(7,3.2) 14(7.5,4.7) 15(5.5,4.7) 16(3.5,4.7) 17(1.5,4.7) 18(-0.5,4.7)
  round 3.5 hole 2.3 paste-2539.97 mask-3.5: 19(-3.07,-2) 19(-3.07,3.68) 19(10.07,-2) 19(10.07,3.68)
  F.SilkS lines w0.254: -3.46,-6.8 -3.46,-4.1 ; -3.46,0.1 -3.46,1.58 ; -3.46,5.78 -3.46,6.08 10.46,6.08 10.46,5.78 ; 10.46,-6.8 10.46,-4.1 ; 10.46,0.1 10.46,1.58 ; -4.5,-0.5 -4.5,0.5 -4,0 -4.5,-0.5
  F.CrtYd lines w0.254: -4.25,-11.94 -3.9,-11.94 10.9,-11.94 11.25,-11.94 11.25,-10.44 10.9,-10.44 10.9,-4.09 ccw(c10.072,-2) 10.9,0.09 10.9,1.59 ccw(c10.072,3.68) 10.9,5.77 10.9,6.52 -3.9,6.52 -3.9,5.77 ccw(c-3.072,3.68) -3.9,1.59 -3.9,0.09 ccw(c-3.072,-2) -3.9,-4.09 -3.9,-10.44 -4.25,-10.44 -4.25,-11.94
USB_A_CUI_UJ2-ADH-TH_Horizontal_Stacked [mm]
  rect 1.5x1.5 hole 0.92 paste-2539.97 mask-1.5: 1(0,0)
  round 1.5 hole 0.92 paste-2539.97 mask-1.5: 2(0,-2.5) 3(0,-4.5) 4(0,-7) 5(2.62,0) 6(2.62,-2.5) 7(2.62,-4.5) 8(2.62,-7)
  round 3.5 hole 2.3 paste-2539.97 mask-3.5: 9(-2.71,3.07) 9(-2.71,-10.07) 9(2.97,3.07) 9(2.97,-10.07)
  F.SilkS lines w0.254: -11.58,3.13 -4.73,3.13 ; 4.07,1.4 4.07,-8.4 ; -11.58,-10.13 -4.73,-10.13 ; -0.5,3.75 0.5,3.75 0,3.25 -0.5,3.75
  F.CrtYd lines w0.254: -13.51,4.55 -13.51,-11.55 -12.21,-11.55 -12.21,-10.5 -4.92,-10.5 ccw(c-2.71,-10.07) -0.5,-10.5 0.76,-10.5 ccw(c2.972,-10.07) 4.44,-8.36 4.44,1.36 ccw(c2.972,3.07) 0.76,3.5 -0.5,3.5 ccw(c-2.71,3.07) -4.92,3.5 -12.21,3.5 -12.21,4.55 -13.51,4.55
USB_C_Receptacle_G-Switch_GT-USB-7010ASV [mm]
  rect 0.6x1.24 smd paste-1.24 mask-1.24: A1(-3.2,3.725) A4(-2.4,3.725) A9(2.4,3.725) A12(3.2,3.725) B1(3.2,3.725) B4(2.4,3.725) B9(-2.4,3.725) B12(-3.2,3.725)
  rect 0.3x1.24 smd paste-1.24 mask-1.24: A5(-1.25,3.725) A6(-0.25,3.725) A7(0.25,3.725) A8(1.25,3.725) B5(1.75,3.725) B6(0.75,3.725) B7(-0.75,3.725) B8(-1.75,3.725)
  rrect100% 1x1.8 hole 1.4 slot 0.6 at 0 deg paste-2539.97 mask-1.8: S1(-4.32,-1.075) S1(4.32,-1.075)
  rrect100% 1x2.1 hole 1.7 slot 0.6 at 0 deg paste-2539.97 mask-2.1: S1(-4.32,3.125) S1(4.32,3.125)
  round 0.65 hole 0.65 paste-2539.97 mask-0.65: Un1(-2.89,2.605) Un2(2.89,2.605)
  F.SilkS lines w0.254: -4.58,-2.08 -4.58,-3.785 4.58,-3.785 4.58,-2.08 ; -4.58,-0.07 -4.58,1.85 ; 4.58,-0.07 4.58,1.85
  F.CrtYd lines w0.254: -5.32,-4.18 -5.32,4.85 5.32,4.85 5.32,-4.18 -5.32,-4.18

## Part data
A1: library part LattePanda_Module_H8.0mm_Horizontal, "LattePanda Module", Description="A micro computing module with x86 processer, RAM and eMMC.", ki_fp_filters=*LattePanda*
BT1: library part Battery_Holder_CR1220_S8411-45R, "S8411-45R_1", Buy_Link=https://item.szlcsc.com/1049689.html, DF_Comment=CR1220电池底座_BS-12-B3AA003
C1 C2 C3 C4 C5 C6 C7 C8 C9 C10 C13 C14 C15 C17 C18 C19 C20 C21 C22 C23 C24 C25 C26 C27 C28 C29 C33 C34 C35 C36 C37 C38 C39 C40 C41 C42 C43 C44 C45 C46 C47 C48 C49 C50 C51 C52 C53 C54 C55 C56 C57 C58 C59 C60 C61 C62 C63 C66 C69 C70 C71 C72 C73 C78 C79 C84: library part C_0402_1005Metric, "Capacitor SMD 0402 (1005 Metric), square (rectangular) end terminal, IPC_7351 nominal, (Body size source: IPC-SM-782 page 76, https://www.pcb-3d.com/wordpress/wp-content/uploads/ipc-sm-782a_amendment_1_and_2.pdf), generated with kicad-footprint-generator", SCH_Show_Footprint=C0402, ki_fp_filters=C_*
  C1 C2 C3 C4 C5 C6 C7 C8 C49 C50 C55 C56: Buy_Link=https://item.szlcsc.com/137804.html, DF_Comment=贴片电容0402-220nF-16V-X7R(0402)_GCM155R71C224KE02D
  C9 C10 C13 C15 C17 C18 C19 C20 C21 C22 C23 C24 C25 C26 C27 C28 C29 C33 C34 C35 C36 C37 C38 C39 C40 C41 C42 C43 C45 C48 C52 C54 C58 C60 C70 C71 C78 C79 C84: DF_Comment=贴片电容0402-100nF-50V-X7R_CC0402KRX7R9BB104
  C14 C44 C51 C53 C57 C59: DF_Comment=贴片电容0402-10UF-10V-X5R_GRM155R61A106ME44D
  C46 C47 C72 C73: DF_Comment=贴片电容0402-12pF-50V-NPO(0402)
  C61 C62 C63 C66 C69: DF_Comment=贴片电容0402-1uF-16V-X5R(0402)
C11 C12 C16: library part CP_Elec_6.3x7.7, "SMD capacitor, aluminum electrolytic, Nichicon, 6.3x7.7mm", SCH_Show_Footprint=C5x5.8, ki_fp_filters=CP_*
  C11 C12: DF_Comment=贴片铝电解6.3*7.7-100uF-25V
  C16: DF_Comment=贴片铝电解电容6.3*7.7-470UF-6.3V
C30 C31 C32 C64 C65 C67 C68 C74 C75 C76 C77 C80 C81 C82 C83: library part C_0603_1608Metric, "Capacitor SMD 0603 (1608 Metric), square (rectangular) end terminal, IPC_7351 nominal, (Body size source: IPC-SM-782 page 76, https://www.pcb-3d.com/wordpress/wp-content/uploads/ipc-sm-782a_amendment_1_and_2.pdf), generated with kicad-footprint-generator", DF_Comment=贴片电容0603-22uF-10V-X5R(0603), SCH_Show_Footprint=C603, ki_fp_filters=C_*
D1 D2 D3 D5 D6 D7 D8 D10 D11 D12 D13 D14 D21 D25: library part D_0402_1005Metric, "Diode SMD 0402 (1005 Metric), square (rectangular) end terminal, IPC_7351 nominal, (Body size source: http://www.tortai-tech.com/upload/download/2011102023233369053.pdf), generated with kicad-footprint-generator", SCH_Show_Footprint=D0402
  D1 D2 D3 D5 D6 D7 D8 D10 D11 D21 D25: Datasheet=https://www.onsemi.com/pub/Collateral/ESD9B-D.PDF, Buy_Link=https://item.szlcsc.com/539388.html, DF_Comment=双向静电保护二极管_ESD5V0B03-1006_DFN1006, ki_fp_filters=D*SOD?923*
  D12 D13 D14: Buy_Link=https://item.szlcsc.com/393990.html, DF_Comment=单向ESD-PESD24VS1UL-N-DFN1006, ki_fp_filters="TO-???* *_Diode_* *SingleDiode* D_*"
D4 D24 D26: library part D_SOD-323, "SOD-323"
  D4 D26: Datasheet=https://datasheet.lcsc.com/lcsc/2204281430_Guangdong-Hottech-1N5819WS_C191023.pdf, DF_Comment=二极管-1N5819W-SOD323备选型号:B5819WS、JSPD140A, SCH_Show_Footprint=SOD-323, ki_fp_filters=D*SOD?323*
  D24: Description="Schottky diode", DF_Comment=稳压二极管-MM3Z3V3-3.3V-SOD323(SOD-323), ki_fp_filters="TO-???* *_Diode_* *SingleDiode* D_*"
D9 D22 D23: library part LED_0603_1608Metric, "LED SMD 0603 (1608 Metric), square (rectangular) end terminal, IPC_7351 nominal, (Body size source: http://www.tortai-tech.com/upload/download/2011102023233369053.pdf), generated with kicad-footprint-generator", SCH_Show_Footprint=LED0603, ki_fp_filters="LED* LED_SMD:* LED_THT:*"
  D9: DF_Comment=贴片LED蓝色0603(0603)
  D22 D23: DF_Comment=贴片LED红色0603(0603)
D15 D16 D17 D18 D19 D20: library part D_SMA, "Diode SMA (DO-214AC)", DF_Comment=二极管-SS54-SMA(SMA), SCH_Show_Footprint=SMA, ki_fp_filters="TO-???* *_Diode_* *SingleDiode* D_*"
F1 R22: library part R_0603_1608Metric, "Resistor SMD 0603 (1608 Metric), square (rectangular) end terminal, IPC_7351 nominal, (Body size source: IPC-SM-782 page 72, https://www.pcb-3d.com/wordpress/wp-content/uploads/ipc-sm-782a_amendment_1_and_2.pdf), generated with kicad-footprint-generator"
  F1: Buy_Link=https://item.szlcsc.com/8530937.html, DF_Comment=0603贴片自恢复保险丝0.05A/6V-0603L005/6AR, SCH_Show_Footprint=R0805, ki_fp_filters=*Fuse*
  R22: DF_Comment=贴片电阻0603-2.49K-1%(0603-1.6*0.8*0.4), ki_fp_filters=R_*
F2 F3 F5: library part Fuse_0805_2012Metric, "Fuse SMD 0805 (2012 Metric), square (rectangular) end terminal, IPC_7351 nominal, (Body size source: https://docs.google.com/spreadsheets/d/1BsfQQcO9C6DZCsRaXUlFlo91Tg2WpOkGARC1WS5S8t0/edit?usp=sharing), generated with kicad-footprint-generator", ki_fp_filters=*Fuse*
  F2 F3: Buy_Link=https://item.szlcsc.com/947770.html, DF_Comment=0805贴片自恢复保险丝1A/6V-BSMD0805-100-6V, SCH_Show_Footprint=R0603
  F5: Buy_Link=https://item.szlcsc.com/947787.html, DF_Comment=0805贴片自恢复保险丝2A/6V-BSMD0805L-200, SCH_Show_Footprint=R0805
F4: library part R_0805_2012Metric, "Resistor SMD 0805 (2012 Metric), square (rectangular) end terminal, IPC_7351 nominal, (Body size source: IPC-SM-782 page 72, https://www.pcb-3d.com/wordpress/wp-content/uploads/ipc-sm-782a_amendment_1_and_2.pdf), generated with kicad-footprint-generator", Buy_Link=https://item.szlcsc.com/947787.html, DF_Comment=0805贴片自恢复保险丝2A/6V-BSMD0805L-200, SCH_Show_Footprint=R0805, ki_fp_filters=*Fuse*
FID1 FID2: library part Fiducial_0.5mm_Mask1mm, "Circular Fiducial, 0.5mm bare copper, 1mm soldermask opening (Level C)", ki_fp_filters=Fiducial*
H1 H2 H3 H4: library part MountingHole_3.2mm_M3_Pad_Via, "Mounting Hole 3.2mm, M3", ki_fp_filters=MountingHole*Pad*
H5 H6: library part MountingHole_3mm_M2_Pad_TopOnly, DF_Comment=贴片螺母柱M2XC4X5.5+C3X1.5, Buy_Link=https://item.taobao.com/item.htm?abbucket=8&id=655855111684&ns=1&skuId=4725777108077&spm=a21n57.1.0.0.5263523chYMn0X, ki_fp_filters=MountingHole*Pad*
H7 H8: library part MountingHole_2.7mm_M2_Pad_TopOnly, "Mounting Hole 3.2mm, M3, DIN965", Buy_Link=https://item.taobao.com/item.htm?abbucket=8&id=655855111684&ns=1&skuId=4725777108077&spm=a21n57.1.0.0.5263523chYMn0X, DF_Comment=贴片螺母柱M2XC4X2.5+C2.7X1.5, ki_fp_filters=MountingHole*Pad*
J1 J8 J10 J11 J14 JP1: library part PinHeader_1x03_P2.54mm_Vertical, "Through hole straight pin header, 1x03, 2.54mm pitch, single row"
  J1 J11: DF_Comment=2.54黑色单排排针-3P, ki_fp_filters=Connector*:*_1x??_*
  J8: DF_Comment=2.54绿色单排排针-3P, ki_fp_filters=Connector*:*_1x??_*
  J10: DF_Comment=2.54蓝色单排排针-3P, ki_fp_filters=Connector*:*_1x??_*
  J14: DF_Comment=2.54红色单排排针-3P, ki_fp_filters=Connector*:*_1x??_*
  JP1: DF_Comment=2.54黑色单排排针-3P, ki_fp_filters="Jumper* TestPoint*3Pads* TestPoint*Bridge*"
J2: library part PCIe_x4_Gen3Slot_Connectors, "8-1734774-1-1", Datasheet=http://www.ritrontek.com/uploadfile/2016/1026/20161026105231124.pdf#page=63, Buy_Link=https://item.szlcsc.com/3251630.html, DF_Comment="PCI-e x4 直插母座_AAA-PCI-161-K03", ki_fp_filters=*PCIexpress*
J3: library part HDMI_A_Molex_208658-1001_Horizontal, "HDMI Molex Type A https://www.molex.com/pdm_docs/sd/2086581001_sd.pdf", Datasheet=https://en.wikipedia.org/wiki/HDMI, DF_Comment=直插式HDMI母座-19Pin(19PIN), ki_fp_filters=HDMI*A*
J4: library part USB3_A_Molex_48406-0001_Horizontal_Stacked, "USB 3.0, type A, right angle, stacked (https://www.molex.com/content/dam/molex/molex-dot-com/products/automated/en-us/salesdrawingpdf/484/48406/484060001_sd.pdf)", Buy_Link=https://item.szlcsc.com/3132965.html, DF_Comment="双层USB3.0 A母座_USB-303WSD-BRY", ki_fp_filters=USB3?A*Stacked*
J5: library part USB_A_CUI_UJ2-ADH-TH_Horizontal_Stacked, "USB-A two stacked horizontal receptacle, through-hole (https://www.cuidevices.com/product/resource/uj2-adh-th.pdf)", Datasheet=~, DF_Comment=USB2.0-A型双层白胶母座, ki_fp_filters=USB*
J6: library part RJ45_UDE_RB1-125B8G1A, "1 Port RJ45 Connector Through Hole 10/100/1000 Base-T, https://datasheet.lcsc.com/szlcsc/1901091107_UDE-Corp-RB1-125B8G1A_C363353.pdf#page=3", Datasheet=https://datasheet.lcsc.com/szlcsc/1901091107_UDE-Corp-RB1-125B8G1A_C363353.pdf, Buy_Link=https://item.szlcsc.com/337919.html, DF_Comment=RJ45_UDE_RB1-125B8G1A, ki_fp_filters=RJ45*UDE*RB1*125B8G1A*
J7 J9 J12 J13: library part PinHeader_1x04_P2.54mm_Vertical, "Through hole straight pin header, 1x04, 2.54mm pitch, single row", ki_fp_filters=Connector*:*_1x??_*
  J7: DF_Comment=2.54绿色单排排针-4P
  J9: DF_Comment=2.54蓝色单排排针-4P
  J12: DF_Comment=2.54黑色单排排针-4P
  J13: DF_Comment=2.54红色单排排针-4P
J15: library part PCIe_M.2_Connectors_P=0.5mm_H=4.2mm_KeyM, "MDT420M02001", Datasheet=http://read.pudn.com/downloads794/doc/project/3133918/PCIe_M.2_Electromechanical_Spec_Rev1.0_Final_11012013_RS_Clean.pdf#page=155, Buy_Link=https://item.szlcsc.com/8568582.html, DF_Comment=M.2连接器KEY-M_H4.2mm-67P_APCI0107-P001A, ki_fp_filters=*M*2*M*
J16: library part PCIe_M.2_Connectors_P=0.5mm_H=4.2mm_KeyE, "MDT420E02001-2", Datasheet=http://read.pudn.com/downloads794/doc/project/3133918/PCIe_M.2_Electromechanical_Spec_Rev1.0_Final_11012013_RS_Clean.pdf#page=150, Buy_Link=https://item.szlcsc.com/8568583.html, DF_Comment=M.2连接器KEY-E_H4.2mm-67P_APCI0108-P001A, ki_fp_filters=*M*2*E*
J17: library part DC_Jack_DC007B_30V_10A, Buy_Link=https://item.szlcsc.com/19360929.html, DF_Comment="12V/10A DC2.5母座", ki_fp_filters=BarrelJack*
J18: library part USB_C_Receptacle_G-Switch_GT-USB-7010ASV, "USB Type C, right-angle, SMT, https://datasheet.lcsc.com/lcsc/2204071530_G-Switch-GT-USB-7010ASV_C2988369.pdf", Datasheet=https://www.usb.org/sites/default/files/documents/usb_type-c.zip, DF_Comment=USB-Type-C卧式贴片母座(TYPE-C-31-M-12), ki_fp_filters=USB*C*Receptacle*
L1 L2: library part L_Sunlord_SWPA4020S, "Inductor, Sunlord, SWPA4020S, 4.0x4.0x2.0mm, https://www.sunlordinc.com/UploadFiles/PDF_Cat/20120704094224784.pdf", DF_Comment=贴片屏蔽电感2.2uH_4.0*4.0*2.0_4.3A, ki_fp_filters="Choke_* *Coil* Inductor_* L_*"
M1: library part JST_PH_B4B-PH-K_1x04_P2.00mm_Vertical, "JST PH series connector, B4B-PH-K (http://www.jst-mfg.com/product/pdf/eng/ePH.pdf), generated with kicad-footprint-generator", Datasheet=http://www.formfactors.org/developer%5Cspecs%5Crev1_2_public.pdf, Buy_Link=https://item.szlcsc.com/255571.html, DF_Comment=JST-B4B-PH-K(LF)(SN), ki_fp_filters="FanPinHeader*P2.54mm*Vertical* PinHeader*P2.54mm*Vertical* TerminalBlock*"
Q1 Q2 Q3 Q4 Q5 Q6 Q8 U13: library part SOT-23, "SOT, 3 Pin (https://www.jedec.org/system/files/docs/to-236h.pdf variant AB), generated with kicad-footprint-generator ipc_gullwing_generator.py", ki_fp_filters=SOT?23*
  Q1 Q5 Q6 Q8: Datasheet=https://www.onsemi.com/pub/Collateral/NDS7002A-D.PDF, DF_Comment=2N7002-N沟道MOS管-SOT-23[备选型号:JMTL2N7002K]
  Q2 Q3 Q4: Datasheet=https://www.onsemi.com/pub/Collateral/NDS7002A-D.PDF, Buy_Link=https://item.szlcsc.com/774253.html, DF_Comment=NMOS_2SK3018_SOT-23
  U13: Datasheet=http://www.ti.com/lit/ds/symlink/tl431.pdf, DF_Comment=参考电压-TL431ACDBZR-SOT23（丝印TAC）
Q7: library part MOSFET_PDFN8_3.3x3.3, "DFN 3x3  EP", DF_Comment=PMOS管NCE30P28Q-DFN3.3X3.3-8L
R1 R2 R3 R4 R5 R6 R7 R8 R9 R10 R11 R13 R14 R15 R16 R17 R18 R19 R20 R21 R23 R24 R25 R27 R29 R30 R32 R33 R34 R35 R36 R37 R38 R39 R40 R41 R42 R43 R44 R45 R46 R47 R48 R49 R50 R51 R52 R53 R54 R55 R56 R57 R58 R59 R60 R64 R66 R68 R69 R72 R76 R77 R78 R79: library part R_0402_1005Metric, "Resistor SMD 0402 (1005 Metric), square (rectangular) end terminal, IPC_7351 nominal, (Body size source: IPC-SM-782 page 72, https://www.pcb-3d.com/wordpress/wp-content/uploads/ipc-sm-782a_amendment_1_and_2.pdf), generated with kicad-footprint-generator", ki_fp_filters=R_*
  R1 R11 R37 R47: DF_Comment=贴片电阻0402-1K-1%
  R2 R20 R21 R34 R35 R36 R38 R40 R49 R50 R56 R58: DF_Comment=贴片电阻0402-10K-1%
  R3 R5 R15 R18 R19 R30 R39 R52 R53: DF_Comment=贴片电阻0402-2.2K-1%
  R4 R23: DF_Comment=贴片电阻0402-1M-1%
  R6 R41 R42 R54 R59 R66 R68: DF_Comment=贴片电阻0402-21.5K-1%
  R7 R8 R9 R10 R13 R14 R16 R17 R24 R25: DF_Comment=贴片电阻0402-470R-1%
  R27 R29 R32 R33: DF_Comment=贴片电阻0402-0R-1%
  R43: DF_Comment=贴片电阻0402-56K-1%(0402)
  R44 R45 R51 R76 R77: DF_Comment=贴片电阻0402-100K-1%
  R46 R48 R55 R69: DF_Comment=贴片电阻0402-100R-1%
  R57: DF_Comment=贴片电阻0402-75K-1%
  R60 R64 R72: DF_Comment=贴片电阻0402-4.7K-1%
  R78 R79: Description=Resistor
SW1 SW2: library part SW_Push_6x6x6, DF_Comment=4脚贴片轻触按键6*6*6mm(金属盖板)
TP1 TP2 TP3 TP4 TP5 TP6 TP7 TP8 TP9 TP10 TP11 TP12 TP13: library part TestPoint_Pad_D1.5mm, "SMD pad as test Point, diameter 1.5mm", ki_fp_filters="Pin* Test*"
  TP3 TP4 TP5 TP6 TP7 TP8 TP9 TP10 TP11 TP12 TP13: Description="test point"
U1 U2 U3 U4 U5 U7 U8 U9 U10 U11 U12: library part Diodes_UDFN-10_1.0x2.5mm_P0.5mm, "U-DFN2510-10 package used by Diodes Incorporated (https://www.diodes.com/assets/Package-Files/U-DFN2510-10-Type-CJ.pdf)", Datasheet=https://www.diodes.com/assets/Datasheets/D3V3XA4B10LP.pdf, ki_fp_filters=Diodes*UDFN*1.0x2.5mm*P0.5mm*
  U1 U2: Buy_Link=https://item.szlcsc.com/2973358.html, DF_Comment=ESD静电保护IC-TPAZ1023-04F-DFN2510-10L
  U3 U4 U5 U7 U8 U9 U10 U11 U12: DF_Comment=ESD静电保护IC-BV-ULC0524P-DFN2510-10L
U6: library part QFN-32-1EP_4x4mm_P0.4mm_EP2.65x2.65mm, "QFN, 32 Pin (https://www.renesas.com/eu/en/package-image/pdf/outdrawing/l32.4x4a.pdf), generated with kicad-footprint-generator ipc_noLead_generator.py", DF_Comment=以太网控制器IC-RTL8111H-CG-RH(PCIE-LAN)-QFN32, ki_fp_filters=RTL8111H_QFN32
U14: library part ESSOP-10-1EP_3.9x5mm_P1.0mm_EP3.2x2.3, DF_Comment="USB PD等快充协议受电芯片-CH224K-ESSOP10", ki_fp_filters=ESSOP10
U15 U16: library part TSOT-23-6, "TSOT, 6 Pin (https://www.jedec.org/sites/default/files/docs/MO-193D.pdf variant AA), generated with kicad-footprint-generator ipc_gullwing_generator.py", Datasheet=https://atta.szlcsc.com/upload/public/pdf/source/20180625/C93736_E75EC6FD4320D65590D2D5BF0D8B8959.pdf, Buy_Link=https://item.szlcsc.com/94934.html, DF_Comment="Buck IC-SY8253ADC-TSOT-23-6", ki_fp_filters=TSOT?23*
Y1: library part Crystal_SMD_3225-4Pin_3.2x2.5mm, "SMD Crystal SERIES SMD3225/4 http://www.txccrystal.com/images/pdf/7m-accuracy.pdf, 3.2x2.5mm^2 package", DF_Comment=贴片晶振-4脚无源-25M-20ppm-3.2*2.5(3225), ki_fp_filters=Crystal*

## Via types
v1: diameter 0.4, hole 0.2, F.Cu to B.Cu, tented both sides, 952 vias
v2: diameter 0.5, hole 0.3, F.Cu to B.Cu, tented both sides, 68 vias

## Nets (pads, with @x,y where several pads share a name; then routed paths per layer and width w, separated by ;. In a path a pad name is that pad's centre, name@x,y a point inside that pad or via, vN(x,y) a via of type N, cw(c..) or ccw(c..) an arc to the next point about the centre after c; other vN are vias at no path point)
5V_HDMI_VCC: C25.1 D4.1 F1.1 R15.1 R18.1 | length 12.1
  F.Cu w0.508: F1.1@-53.485,10.875 F1.1@-53.46,10.9 ; R18.1@-50.965,9.37 -50.965,9.306 -51.721,8.55 -52.655,8.55 C25.1@-53.505,9.4 -53.46,9.445 F1.1@-53.46,10.9 ; R15.1@-50.485,16.14 -50.485,15.5 -51.156,14.829 -52.456,14.829 -53.235,14.05 D4.1@-53.235,12.71 -53.235,11.125 F1.1@-53.46,10.9
+1V0: C33.2 C34.2 C35.2 C36.2 C40.2 C44.2 U6.3 U6.8 U6.22 U6.24 U6.30 | length 30.1
  F.Cu w0.15: C40.2@-96.075,34.36 -95.155,34.36 C44.2@-95.145,34.35 -95.145,32.98 -94.335,32.17 U6.24@-94.335,31.49 ; U6.3@-93.535,27.59 v1(-93.535,26.127) -93.52,26.112 C35.2@-93.52,25.97 ; U6.22@-93.535,31.49 -93.535,33.103 v1(-93.755,33.323) -93.275,33.803 C33.2@-93.275,34.33
  F.Cu w0.2: C34.2@-96.695,28.08 -96.695,28.275 v1(-96.12,28.85) -96.03,28.94 U6.30@-94.885,28.94 ; U6.8@-91.535,27.59 -91.535,26.927 v1(-90.735,26.127) C36.2@-90.735,25.77
  In2.Cu w0.4: -96.79,29.69 -96.79,31 -95.145,32.645 ; -96.74,29.69 -96.12,29.07 v1(-96.12,28.85) ; v1(-95.145,33.29) -95.145,32.645 ; v1(-93.755,33.323) -93.755,33.17 -93.786,33.139 -93.786,33.114 -93.806,33.094 -93.806,33.074 -94.158,32.723 -94.202,32.723 -94.28,32.645 ; v1(-90.735,26.127) v1(-93.535,26.127) -93.535,26.915 -94.28,27.66 -94.28,32.645 ; -95.145,32.645 -94.28,32.645
+3V3: C13.2 C14.2 C15.1 C16.1 C37.2 C41.2 C45.2 C51.2 C52.2 C53.2 C54.2 C57.2 C58.2 C59.2 C60.2 C73.1 C75.2 C77.2 C79.1 C81.2 C83.2 J2.A9 J2.A10 J2.B8 J2.B10 J13.1 J13.2 J13.3 J13.4 J14.1 J14.2 J14.3 J15.2 J15.4 J15.12 J15.14 J15.16 J15.18 J15.70 J15.72 J15.74 J16.2 J16.4 J16.72 J16.74 L2.2 Q1.1 Q2.1 Q3.1 R3.1 R4.1 R5.1 R20.1 R21.1 R24.2 R25.2 R30.2 R34.2 R35.1 R50.2 R52.2 R56.2 R59.2 R64.1 TP6.1 U6.11 U6.23 U6.32 | length 492
  F.Cu w0.15: R24.2@-98.09,20.52 -98.09,23.27 v1(-96.87,24.49) C41.2@-95.4,25.96 -95.4,26.84 -95.685,27.125 -95.685,27.88 -95.425,28.14 U6.32@-94.885,28.14 ; C45.2@-94.205,34.34 -94.36,34.185 -94.36,32.815 -93.935,32.39 U6.23@-93.935,31.49
  F.Cu w0.2: R52.2@-131.69,90.24 -131.68,90.25 v1(-131.68,91.09) ; R50.2@-125.4,87.5 -125.38,87.48 v1(-124.59,87.48) ; J15.2@-108.985,28.28 -108.985,26.475 -109.69,25.77 R30.2@-109.69,24.49 v1(-105.8,24.49) ; J15.4@-108.985,28.78 -107.65,28.78 -107.11,29.32 C54.2@-106.29,29.32 ; J15.12@-108.985,30.78 -107.77,30.78 -107.51,31.04 -107.75,31.28 J15.14@-108.985,31.28 ; J15.16@-108.985,31.78 -107.78,31.78 -107.53,32.03 -107.78,32.28 J15.18@-108.985,32.28 ; J15.74@-108.985,46.28 -107.71,46.28 -107.21,45.78 ; R56.2@-108.96,88.59 -108.96,87.49 v1(-108.94,87.47) ; R35.1@-105.31,65.79 R34.2@-105.31,66.73 ; R21.1@-92.335,35.33 -91.395,35.33 R20.1@-91.385,35.34 -91.385,36.185 v1(-91.38,36.19) ; U6.11@-90.985,28.94 -89.134,28.94 -88.584,28.39 C37.2@-88.58,28.39 v1(-88.58,27.543) -88.58,20.57 R25.2@-88.57,20.56 ; R64.1@-79.6,74.42 -79.256,74.42 v1(-79.142,74.305) -79.142,74.412 v1@-79.15,74.42 ; v1(-55.36,15.59) R4.1@-55.36,16.108 ; v1(-53.02,18.6) Q1.1@-53.02,20.445 ; R3.1@-52.065,9.363 -52.06,9.363 v1(-51.67,9.753) ; v1(-51.5,15.62) R5.1@-51.5,16.13 ; v1(-49.885,12.65) Q3.1@-49.885,13.828 ; v1(-49.6,18.32) -49.61,18.33 Q2.1@-49.61,20.447 -49.61,22.825 -42.955,29.48 -24.157,29.48 v1(-23.766,29.871)
  F.Cu w0.25: J16.2@-109.22,52.76 -106.73,52.76 C57.2@-106.3,52.33 ; J16.4@-109.22,53.26 C58.2@-106.3,53.26 ; J16.72@-109.22,70.26 -106.31,70.26 C59.2@-106.3,70.27 C60.2@-106.3,71.19 -107.09,71.19 -107.52,70.76 J16.74@-109.22,70.76 ; J15.70@-108.985,45.28 -107.71,45.28 -107.21,45.78 J15.72@-108.985,45.78 ; C51.2@-106.33,46.5 C52.2@-106.33,47.43 ; -105.375,68.005 -105.28,67.91 -105.31,67.88 R34.2@-105.31,66.73 ; C73.1@-2.79,27.75 -2.79,28.69 R59.2@-2.76,28.72 v1(-2.17,28.72)
  F.Cu w0.4: C13.2@-126.22,40.503 C15.1@-126.22,42.35 ; J15.2@-108.985,28.28 -106.41,28.28 C53.2@-106.29,28.4 C54.2@-106.29,29.32 ; -107.53,32.03 -107.31,32.03 -106.81,31.53 -107.3,31.04 -107.51,31.04 ; -107.21,45.78 -107.05,45.78 C51.2@-106.33,46.5 v1(-106.33,47.85) v1(-106.33,48.42) ; C57.2@-106.3,52.33 C58.2@-106.3,53.26 ; v1(-91.44,37.94) -91.38,37.88 v1(-91.38,36.19)
  F.Cu w0.6: -106.81,31.53 -106.8,31.54 -106.29,31.54 ; C58.2@-106.3,53.26 v1(-106.3,54.75) v1@-106.3,55.1 ; C59.2@-106.3,70.27 v1(-106.3,69.68) v1(-106.3,69.25) -106.3,68.93 v1(-106.115,68.745) v1(-105.69,68.32) v1@-105.62,68.25 ; C54.2@-106.29,29.32 v1@-106.29,38.27 ; -105.375,68.005 v1@-105.62,68.25 ; R34.2@-105.31,66.73 -105.31,67.94 v1@-105.62,68.25
  B.Cu w0.2: v1(-131.68,91.09) -128.07,87.48 v1(-124.59,87.48) -124.58,87.47 v1(-108.94,87.47) -104.51,87.47 -102.68,89.3 -102.68,94.43 -101.28,95.83 J14.1@-99.88,95.83 ; v1(-79.142,74.305) -79.12,74.284 -79.12,71.88 ; v1(-55.36,15.59) -55.36,15.92 -54.74,16.54 -53.46,16.54 ; v1(-51.5,15.62) -52.38,16.5 -52.38,16.54 -53.46,16.54 ; v1(-49.6,18.32) -50.09,18.81 -52.81,18.81 v1(-53.02,18.6) -53.46,18.16 -53.46,16.54 ; v1(-23.766,29.871) -23.017,30.62 -17.9,30.62
  B.Cu w0.25: -17.9,30.62 -17.85,30.57 -4.02,30.57 v1(-2.17,28.72)
  B.Cu w2: -119.71,65.49 -119.71,67.53 -118.29,68.95 -99.9,68.95 -96.97,71.88 -79.12,71.88 -77.49,71.88 -75.12,74.25 -75.12,79.86 -75.12,94.72 -76.26,95.86 -85.665,95.86 -85.695,95.83 J14.1@-99.88,95.83
  B.Cu w3: -75.12,79.86 -30.75,79.86 -17.9,67.01 -17.9,30.62 -17.9,23.61
  In2.Cu w0.2: v1(-105.8,24.49) v1(-96.87,24.49) ; -93.57,34.94 -92.88,34.25 -92.88,33.281 -92.42,32.821 -91.911,32.821 -90.28,31.19 -90.28,29.243 v1(-88.58,27.543) ; v1(-51.67,9.753) -49.885,11.538 v1(-49.885,12.65) -49.885,14.005 v1(-51.5,15.62)
  In2.Cu w0.4: v1(-105.81,38.32) -91.39,38.32 ; v1(-94.406,33.323) -94.43,33.347 -94.43,34.08 -93.57,34.94 -92.32,36.19 v1(-91.38,36.19)